# Altium PCB E17-08-HIU.PcbDoc
Units mm, origin at the board's own origin, x right, y up, seen from the top; angles counter-clockwise.
Board outline 49.53 x 49.53 mm, 2 copper layers (Top Layer, Bottom Layer); 15 components, 14 nets, 59 pads, 43 vias.
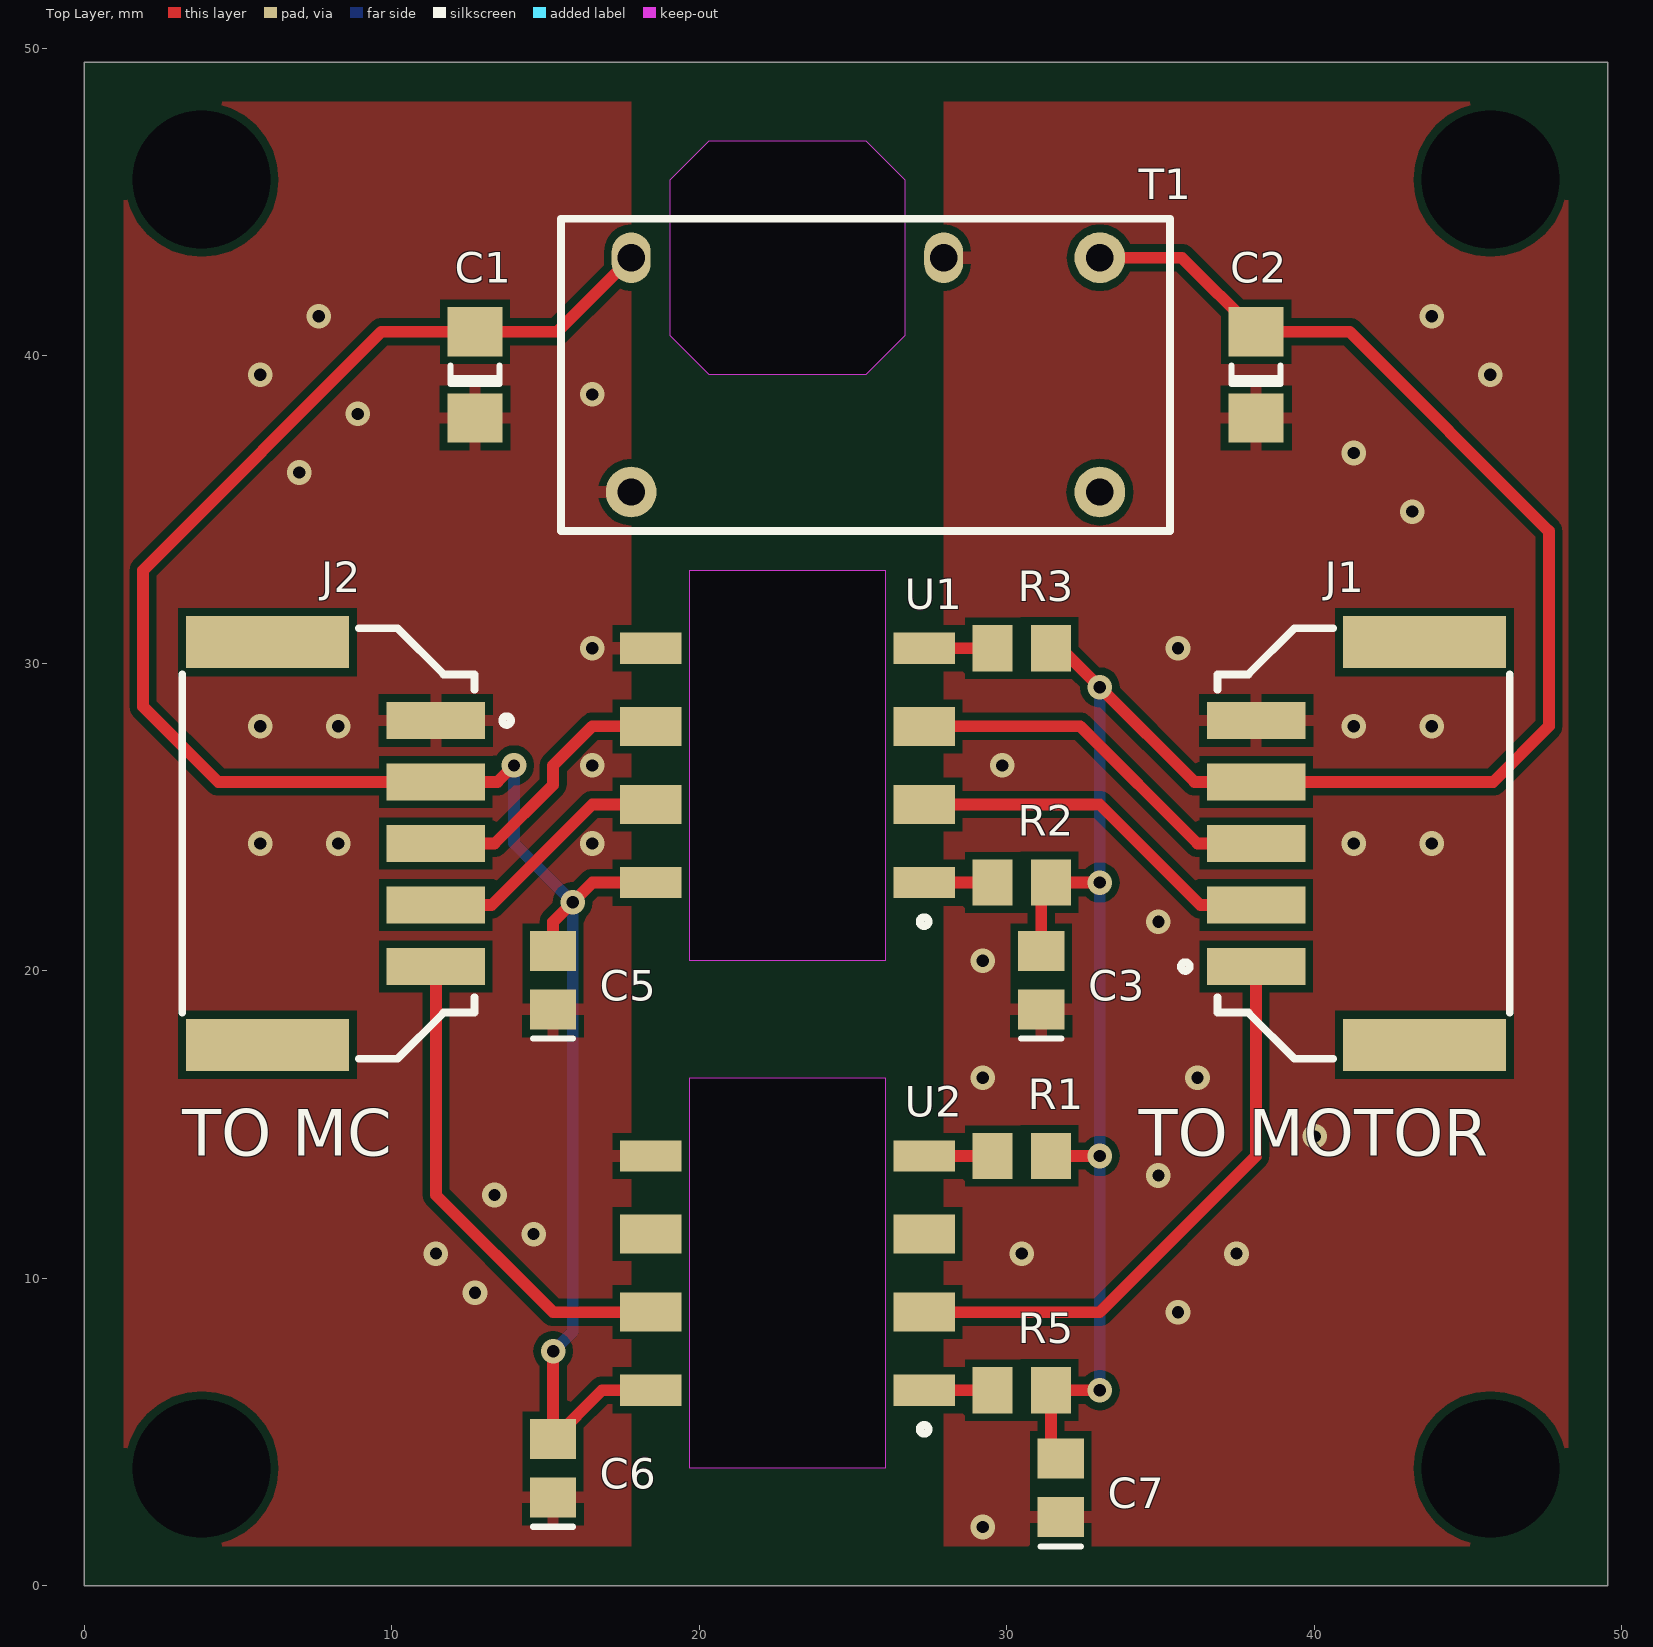
[diagram p0: Top Layer view]
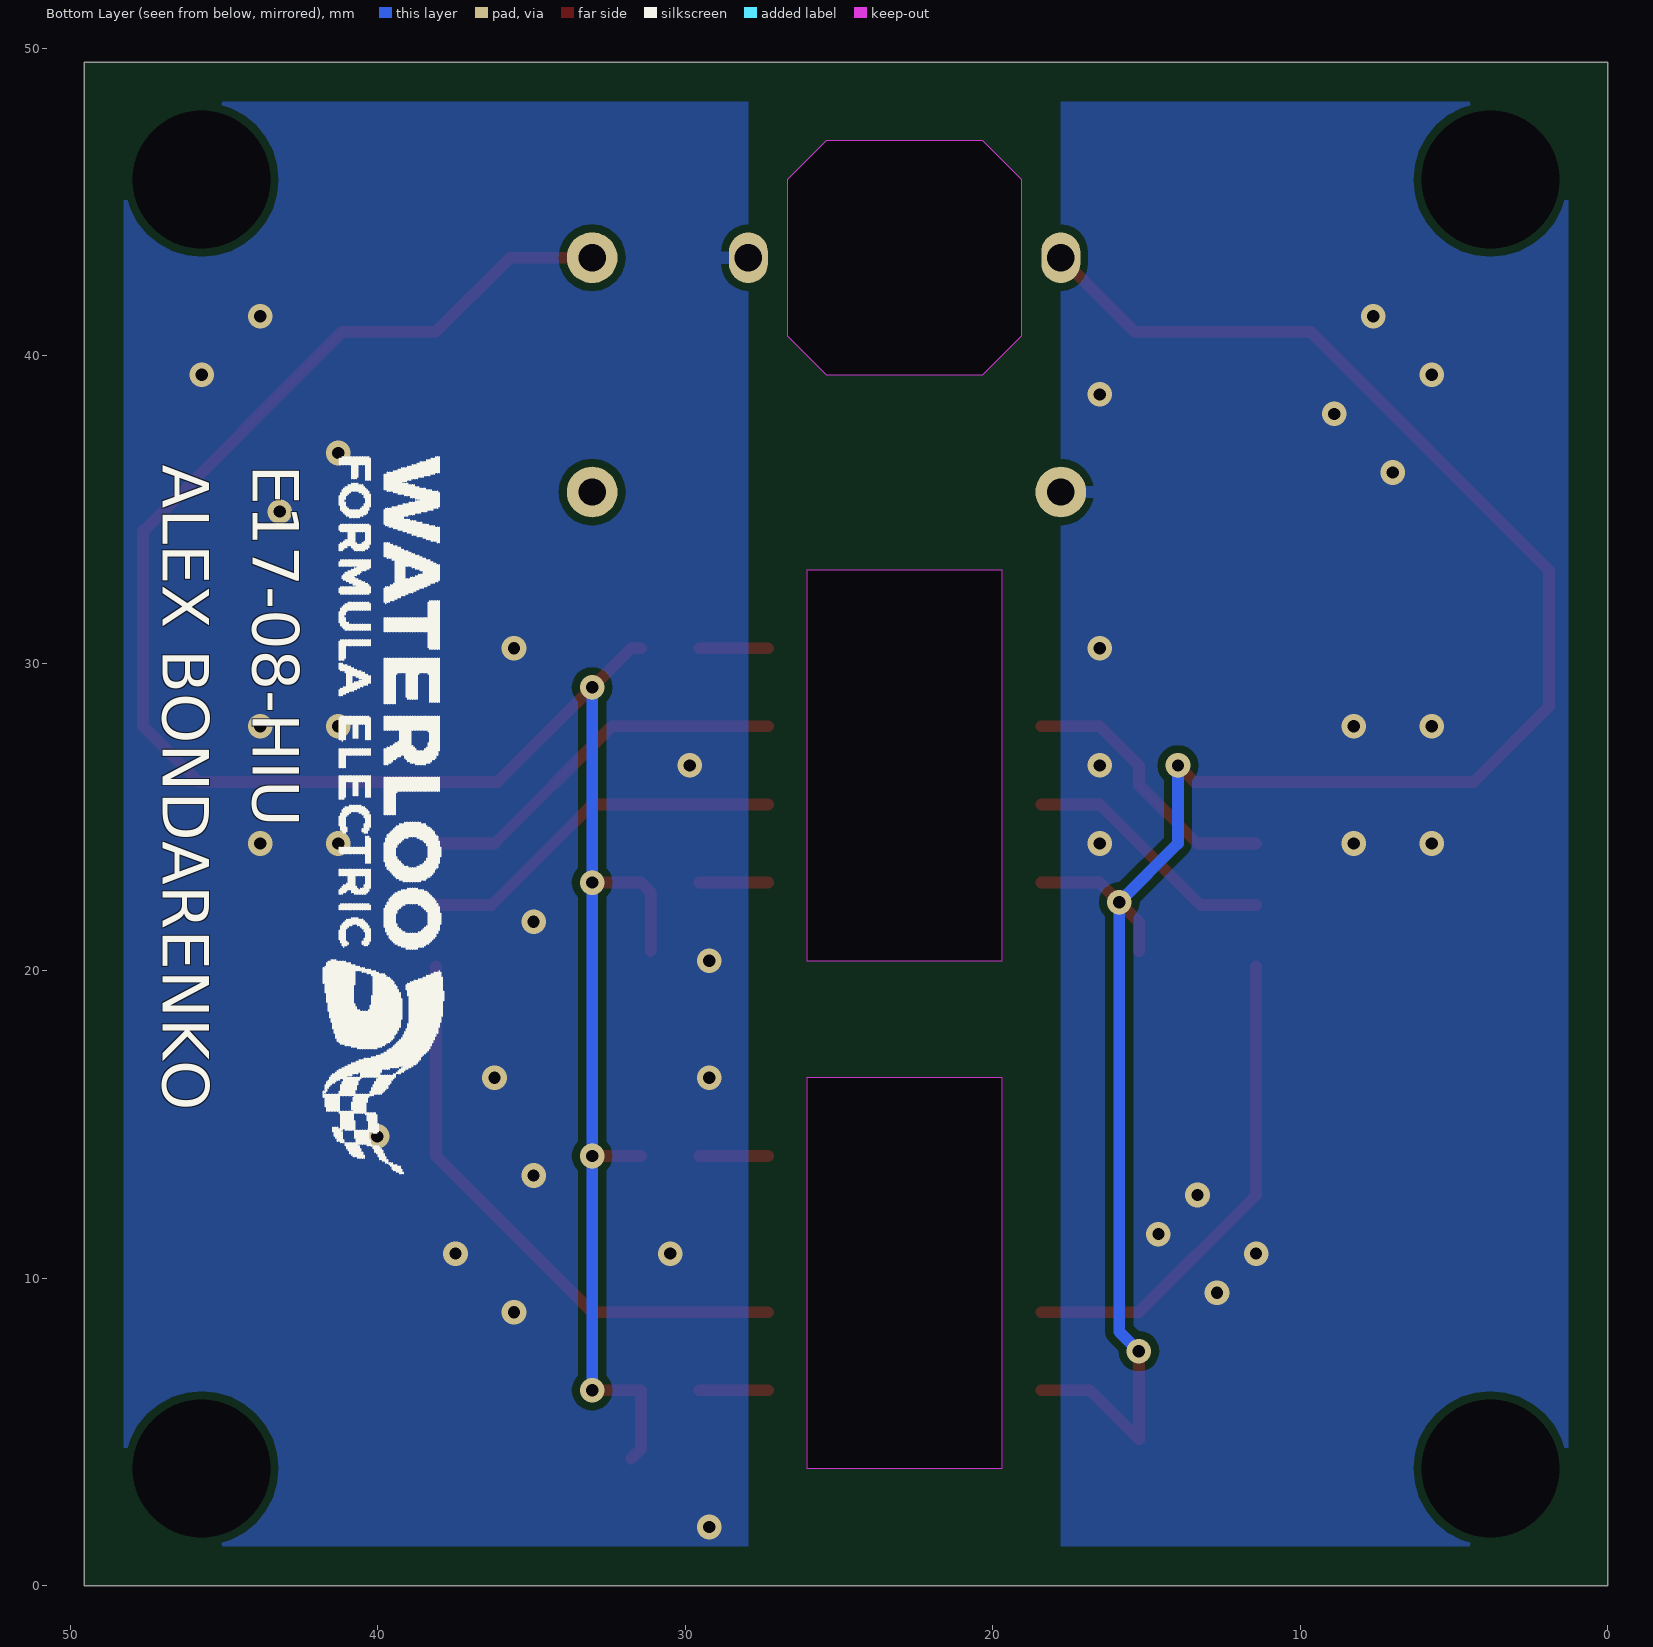
[diagram p1: Bottom Layer view, seen from below]

## Layer stack, top to bottom
Top Solder: solder mask 0.0102, Solder Resist, Dk 3.5
Top Layer: signal copper 0.0356
Dielectric 1: dielectric 0.32, FR-4, Dk 4.8
Bottom Layer: signal copper 0.0356
Bottom Solder: solder mask 0.0102, Solder Resist, Dk 3.5

## Board outline
0,0 0,49.53 49.53,49.53 49.53,0

## Design rules (kind name [scope] priority, off if disabled: settings)
Clearance [All] p1: gap=0.254 ignorepadtopadclearanceinfootprint=FALSE except(0: Arc-Hole Track-Hole SMDPad-Hole THPad-Hole Via-Hole Fill-Hole Poly-Hole Region-Hole Text-Hole)
PlaneConnect [All] p1: planeconnectstyle=Relief reliefexpansion=0.508 reliefentries=4 reliefconductorwidth=0.381 reliefairgap=0.254
PolygonConnect [All] p1: connectstyle=Relief reliefconductorwidth=0.381 reliefentries=4 polygonreliefangle="90 Angle" airgapwidth=0.254
RoutingVias [All] p1: holewidth=0.711 width=1.27 viastyle="Through Hole" minholewidth=0.711 minwidth=1.27 maxholewidth=0.711 maxwidth=1.27
SolderMaskExpansion [All] p1: expansion=0.102
Width [All] p1: maxlimit=0.762 minlimit=0.203 preferedwidth=0.381
29 further rules are at their usual default settings.

## Components (designator, comment, footprint, x,y, rotation, side; value= is the part's Value field where it differs from the comment)
C1 "Cap" C1206 12.7,39.37 r90 top
C2 "Cap" C1206 38.1,39.37 r90 top
C3 "Cap" C0805 31.115,19.685 r90 top
C5 "Cap" C0805 15.24,19.685 r90 top
C6 "Cap" C0805 15.24,3.81 r90 top
C7 "Cap" C0805 31.75,3.175 r90 top
J1 "502352-0501" 502352-0501 38.1,24.13 r90 top
J2 "502352-0501" 502352-0501 11.43,24.13 r270 top
R1 "Res" 2012[0805] 30.48,13.97 r0 top
R2 "Res" 2012[0805] 30.48,22.86 r0 top
R3 "Res" 2012[0805] 30.48,30.48 r0 top
R5 "Res" 2012[0805] 30.48,6.35 r0 top
T1 "MEV1SxxxxDC" MEV1SxxxxDC 17.78,35.56 r0 top
U1 "HCPL2631SD" HCPL2631SD 22.86,26.67 r270 top
U2 "HCPL2631SD" HCPL2631SD 22.86,10.16 r270 top

## Footprints (in the part's own frame and the unit in brackets; to place one, negate y for a bottom-side part, rotate by r counter-clockwise, add the part's x,y. Pads: shape width x height; smd on the part's side, far side on the other; paste and mask are expansions set on the pad)
2012[0805] [mm] "Chip Resistor; Body 2.0 x 1.3 mm (LxW typ)"
  rect 1.3x1.5 smd: 1(-0.95,0) 2(0.95,0)
  body extent -0.97,-0.61 1.03,0.64, height 0.77
502352-0501 [mm]
  rect 1.2x3.2 smd: 1(-4,0) 2(-2,0) 3(0,0) 4(2,0) 5(4,0)
  rect 1.7x5.3 smd: 7(-6.55,-5.48) 8(6.55,-5.48)
  silkscreen extent -7,-8.25 7,2.44
C0805 [mm] "Chip Capacitor; Body 2.0 x 1.2 mm (LxW typ)"
  rect 1.3x1.5 smd: 1(-0.95,0) 2(0.95,0)
  silkscreen extent -1.9,-0.65 -1.9,0.65
C1206 [mm] "Chip Capacitor; Body 3.2 x 1.6 mm (LxW typ)"
  rect 1.6x1.8 smd: 1(-1.4,0) 2(1.4,0)
  silkscreen extent -0.3,-0.8 0.3,0.8
HCPL2631SD [mm]
  rect 1.016x2 smd: 1(3.81,4.445) 4(-3.81,4.445) 5(-3.81,-4.445) 8(3.81,-4.445)
  rect 1.27x2 smd: 2(1.27,4.445) 3(-1.27,4.445) 6(-1.27,-4.445) 7(1.27,-4.445)
  Keep-Out Layer board cut-out: -6.35,3.175 6.35,3.175 6.35,-3.175 -6.35,-3.175
  silkscreen extent 4.94,4.3 5.22,4.59
MEV1SxxxxDC [mil]
  round 65 hole 35: 1(0,0) 7(600,0) 8(600,300)
  oval 50x65 hole 35: 10(400,300) 14(0,300)
  Keep-Out Layer board cut-out: 300,450 350,400 350,200 300,150 100,150 50,200 50,400 100,450
  silkscreen extent -90,-50 690,350

## Part data
C1 C2 C3 C5 C6 C7: "Capacitor"
R1 R2 R3 R5: "Surface Mount Resistor"

## Free pads (board coordinates)
  round 0 hole 4.496 unplated: 1(3.81,3.81) 1(3.81,45.72) 1(45.72,3.81) 1(45.72,45.72)

## Via types
v1: diameter 0.8, hole 0.4, Top Layer to Bottom Layer, tented both sides, 43 vias

## Nets (pads, with @x,y where several pads share a name; then routed paths per layer and width w, separated by ;. In a path a pad name is that pad's centre, name@x,y a point inside that pad or via, vN(x,y) a via of type N, cw(c..) or ccw(c..) an arc to the next point about the centre after c; other vN are vias at no path point)
GND: C1.1 C5.1 C6.1 J2.1 T1.1 U1.5 U2.5
  other v1: 12.7,9.525 11.43,10.795 14.605,11.43 13.335,12.7 5.715,24.13 8.255,24.13 16.51,24.13 16.51,26.67 5.715,27.94 8.255,27.94 16.51,30.48 6.985,36.195 8.89,38.1 16.51,38.735 5.715,39.37 7.62,41.275
HVGND: C2.1 C3.1 C7.1 J1.5 T1.10
  other v1: 29.21,1.905 35.56,8.89 30.48,10.795 37.465,10.795 34.925,13.335 40.005,14.605 29.21,16.51 36.195,16.51 29.21,20.32 34.925,21.59 41.275,24.13 43.815,24.13 29.845,26.67 41.275,27.94 43.815,27.94 35.56,30.48 43.18,34.925 41.275,36.83 45.72,39.37 43.815,41.275
HVVCC: C2.2 C3.2 C7.2 J1.4 R1.2 R2.2 R3.2 R5.2 T1.8 | length 75.7
  Top Layer w0.381: C3.2 31.115,22.545 R2.2 v1(33.02,22.86) ; R1.2 v1(33.02,13.97) ; R3.2 31.75,30.48 v1(33.02,29.21) 36.1,26.13 J1.4 45.815,26.13 47.625,27.94 47.625,34.29 41.145,40.77 C2.2 35.69,43.18 T1.8 ; C7.2 31.43,4.445 R5.2 v1(33.02,6.35)
  Bottom Layer w0.381: v1(33.02,6.35) v1(33.02,13.97) v1(33.02,22.86) v1(33.02,29.21)
NetJ1_1: J1.1 U2.2 | length 19.1
  Top Layer w0.381: U2.2 33.02,8.89 38.1,13.97 J1.1
NetJ1_2: J1.2 U1.2 | length 12.1
  Top Layer w0.381: U1.2 33.02,25.4 36.29,22.13 J1.2
NetJ1_3: J1.3 U1.3 | length 12.4
  Top Layer w0.381: U1.3 32.385,27.94 36.195,24.13 J1.3
NetJ2_3: J2.3 U1.6 | length 8.9
  Top Layer w0.381: J2.3 13.335,24.13 15.24,26.035 15.24,26.67 16.51,27.94 U1.6
NetJ2_4: J2.4 U1.7 | length 8.3
  Top Layer w0.381: J2.4 13.24,22.13 16.51,25.4 U1.7
NetJ2_5: J2.5 U2.7 | length 16
  Top Layer w0.381: J2.5 11.43,12.7 15.24,8.89 U2.7
NetR1_1: R1.1 U2.4 | length 2.2
  Top Layer w0.381: U2.4 R1.1
NetR2_1: R2.1 U1.1 | length 2.2
  Top Layer w0.381: U1.1 R2.1
NetR3_1: R3.1 U1.4 | length 2.2
  Top Layer w0.381: U1.4 R3.1
NetR5_1: R5.1 U2.1 | length 2.2
  Top Layer w0.381: U2.1 R5.1
VCC: C1.2 C5.2 C6.2 J2.2 T1.14 U1.8 U2.8 | length 69.3
  Top Layer w0.381: v1(13.97,26.67) 13.43,26.13 J2.2 4.35,26.13 1.905,28.575 1.905,33.02 9.655,40.77 C1.2 15.37,40.77 T1.14 ; v1(15.24,7.62) C6.2 16.83,6.35 U2.8 ; C5.2 15.24,21.59 v1(15.875,22.225) 16.51,22.86 U1.8
  Bottom Layer w0.381: v1(13.97,26.67) 13.97,24.13 v1(15.875,22.225) 15.875,8.255 v1(15.24,7.62)
pads on no net: J1.7 J1.8 J2.7 J2.8 T1.7 U2.3 U2.6

## Polygon pours and split planes (outlines as drawn)
HVGND on Top Layer "Top Layer-No Net" (solid, remove dead copper, pour order 9): 48.26,48.26 27.94,48.26 27.94,1.27 48.26,1.27
GND on Top Layer "Top Layer-No Net" (solid, remove dead copper, pour order 7): 1.27,1.27 17.78,1.27 17.78,48.26 1.27,48.26
GND on Bottom Layer "Top Layer-No Net" (solid, remove dead copper, pour order 6): 1.27,1.27 17.78,1.27 17.78,48.26 1.27,48.26
HVGND on Bottom Layer "Top Layer-No Net" (solid, remove dead copper, pour order 8): 48.26,48.26 27.94,48.26 27.94,1.27 48.26,1.27

## Silkscreen, mask and mechanical layers (free items; w line width, h text height)
Top Overlay:
  text "TO MC" at 3.175,13.97 h1.52
  text "TO MOTOR" at 34.29,13.97 h1.52
Bottom Overlay:
  drawing of 1116 lines, arcs and shapes, not listed
  text "E17-08-HIU" at 44.065,36.447 h1.52 r90
  text "ALEX BONDARENKO" at 46.99,36.447 h1.52 r90
Mechanical 1:
  lines w0.254: 0,0 49.53,0 49.53,49.53 0,49.53 0,0 ; 19.685,3.81 26.035,3.81 26.035,16.51 19.685,16.51 19.685,3.81 ; 19.685,20.32 19.685,33.02 26.035,33.02 26.035,20.32 19.685,20.32